# Altium PCB OSD335-X_Devboard.PcbDoc
Units mil, origin at the board's own origin, x right, y up, seen from the top; angles counter-clockwise.
Board outline 3937.01 x 3937.01 mil, 4 copper layers (01_TOP, 02_GND, 03_POWER, 04_BOTTOM), stack 61.811 mil thick; 2 components, 0 nets, 272 pads, 0 vias.
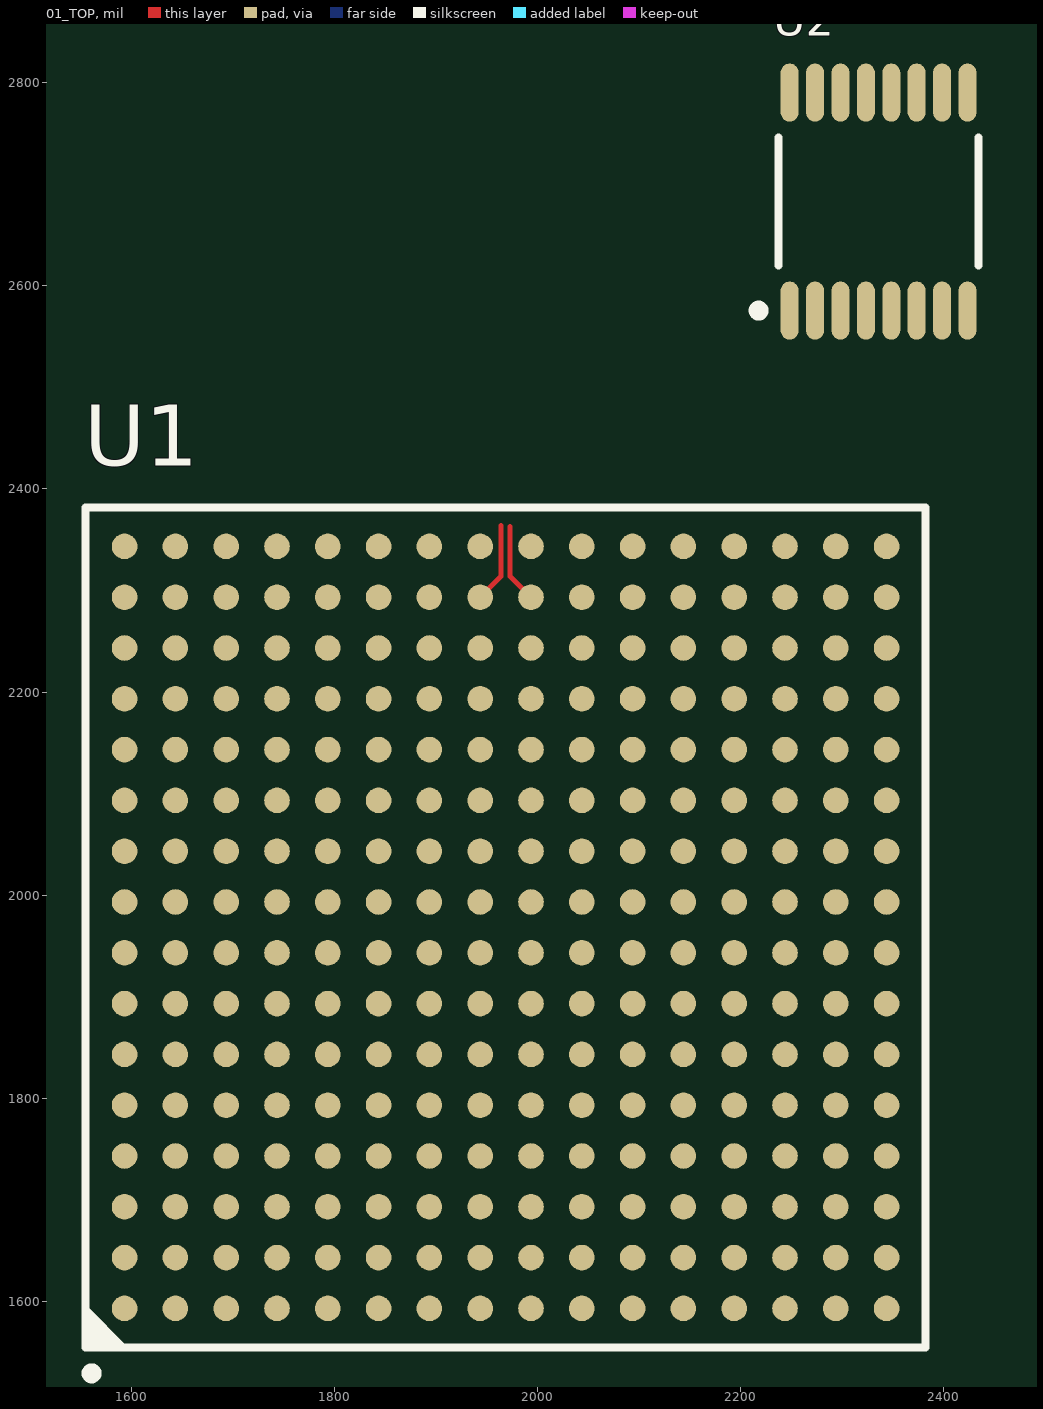
[diagram p0: 01_TOP view]
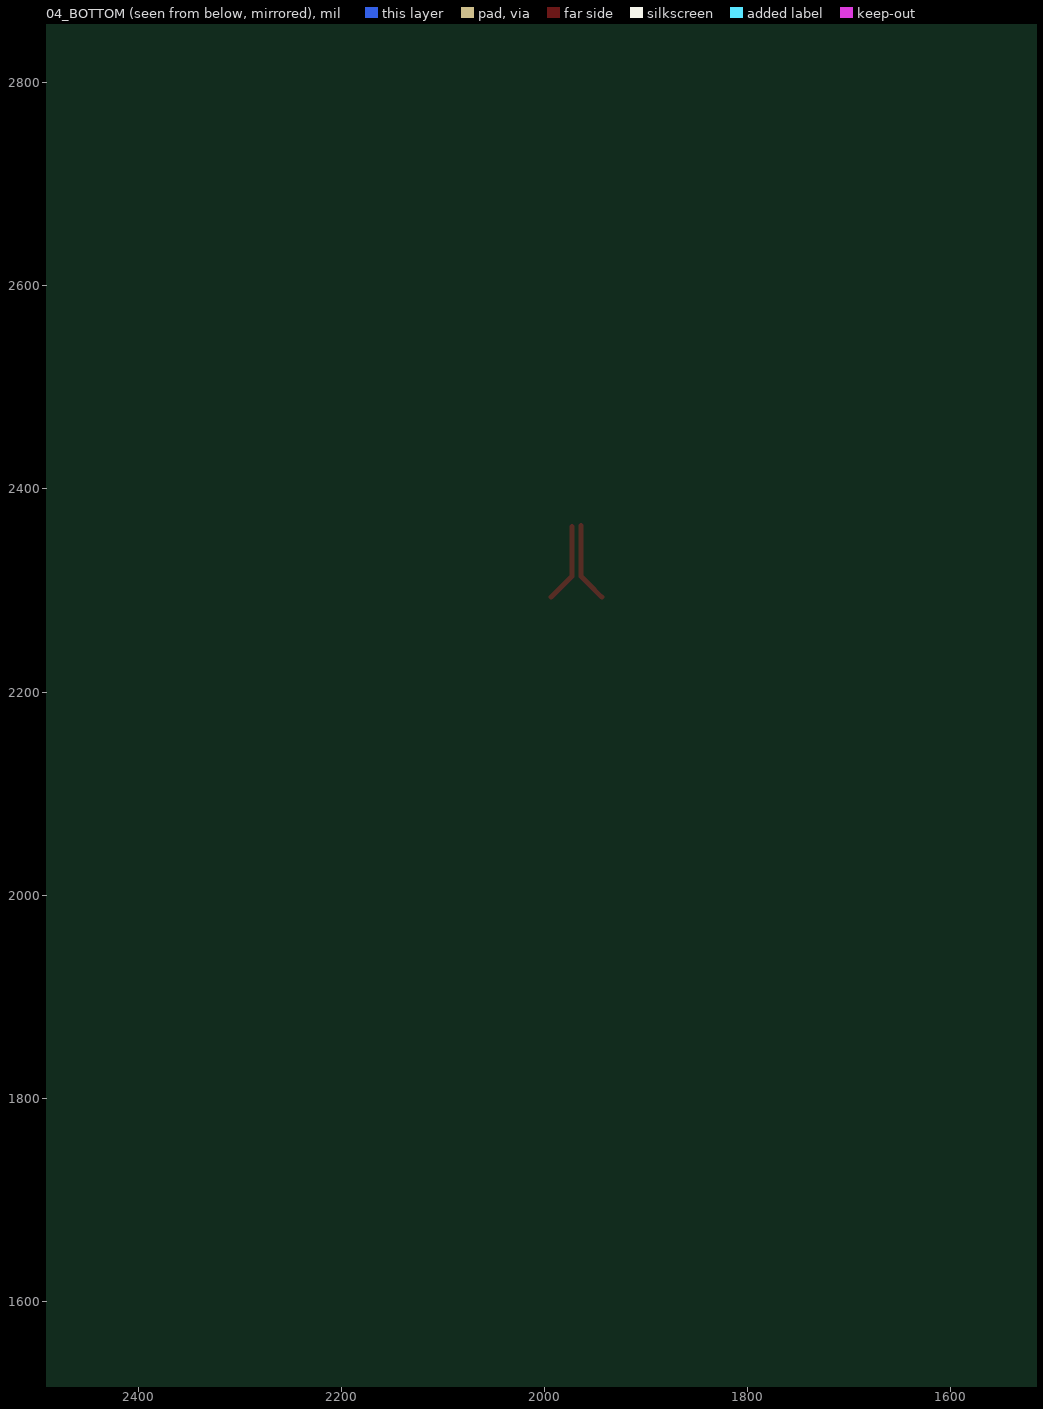
[diagram p1: 04_BOTTOM view, seen from below]

## Layer stack, top to bottom
Top Solder: solder mask 0.4, Solder Resist, Dk 3.5
01_TOP: signal copper 1.3779
Dielectric 4: prepreg 7.874, FR-4, Dk 4.1
02_GND: signal copper 0.6889
Dielectric 1: core 41.9291, Core-009, Dk 4.5
03_POWER: signal copper 0.6889
Dielectric 5: prepreg 7.874, FR-4, Dk 4.1
04_BOTTOM: signal copper 1.3779
Bottom Solder: solder mask 0.4, Solder Resist, Dk 3.5

## Board outline
0,0 3937.01,0 3937.01,3937.01 0,3937.01

## Design rules (kind name [scope] priority, off if disabled: settings)
BoardOutlineClearance [All] p1: gap=10 ignorepadtopadclearanceinfootprint=FALSE except(0: Arc-SplitContinuation Track-SplitContinuation SMDPad-SplitContinuation THPad-SplitContinuation Via-SplitContinuation Fill-SplitContinuation Poly-SplitContinuation Region-SplitContinuation Text-SplitContinuation)
Clearance [All] p1: gap=6 ignorepadtopadclearanceinfootprint=FALSE except(4: Arc-Arc Arc-Track Track-Track; 5: Arc-SMDPad Track-SMDPad)
DiffPairsRouting [All] p1: maxlimit=30 minlimit=5 mostfreqgap=12 toplayer_minwidth=5 toplayer_maxwidth=30 toplayer_prefwidth=12 midlayer1_minwidth=5 midlayer1_maxwidth=30 midlayer1_prefwidth=12 midlayer2_minwidth=5 midlayer2_maxwidth=30 midlayer2_prefwidth=12 bottomlayer_minwidth=5 bottomlayer_maxwidth=30 bottomlayer_prefwidth=12 maxuncoupledlength=500
HoleSize [All] p1: absolutevalues=TRUE maxlimit=120 minlimit=1 maxpercent=80.000 minpercent=20.000
MinimumSolderMaskSliver [All] p1: minsoldermaskwidth=5
PolygonConnect [All] p1: thpad.connectstyle=Relief thpad.reliefconductorwidth=10 thpad.reliefentries=4 thpad.polygonreliefangle="90 Angle" thpad.airgapwidth=10 smdpad.connectstyle=Relief smdpad.reliefconductorwidth=10 smdpad.reliefentries=4 smdpad.polygonreliefangle="90 Angle" smdpad.airgapwidth=10 via.connectstyle=Direct via.reliefconductorwidth=10 via.reliefentries=4 via.polygonreliefangle="90 Angle" via.airgapwidth=10
RoutingVias [All] p1: holewidth=12 width=22 viastyle="Through Hole" minholewidth=10 minwidth=20 maxholewidth=50 maxwidth=70
SilkToSilkClearance [All] p1: silktosilkclearance=2
SilkToSolderMaskClearance [IsPad] p1: minsilkscreentomaskgap=2 clearancetoexposedcopper=TRUE
SolderMaskExpansion [All] p1: expansion=4
Width [All] p1: maxlimit=100 minlimit=5 preferedwidth=10 toplayer_maxwidth=10 toplayer_prefwidth=5 bottomlayer_prefwidth=5 minimp=50.000000 maximp=50.000000 favimp=50.000000
25 further rules are at their usual default settings.

## Components (designator, comment, footprint, x,y, rotation, side; value= is the part's Value field where it differs from the comment)
U1 "Comment" BGA256C127P16X16_2100X2100X308 1968.5,1968.5 r90 top locked
U2 "Comment" SOP64P600X175-16N 2335.62,2682.88 r90 top

## Footprints (in the part's own frame and the unit in brackets; to place one, negate y for a bottom-side part, rotate by r counter-clockwise, add the part's x,y. Pads: shape width x height; smd on the part's side, far side on the other; paste and mask are expansions set on the pad)
BGA256C127P16X16_2100X2100X308 [mm] "BGA, 256-Leads, Body 21.00x21.00mmx3.08mm, Pitch 1.27mm"
  round 0.64 smd: A1(-9.525,9.525) A2(-8.255,9.525) A3(-6.985,9.525) A4(-5.715,9.525) A5(-4.445,9.525) A6(-3.175,9.525) A7(-1.905,9.525) A8(-0.635,9.525) A9(0.635,9.525) A10(1.905,9.525) A11(3.175,9.525) A12(4.445,9.525) A13(5.715,9.525) A14(6.985,9.525) A15(8.255,9.525) A16(9.525,9.525) B1(-9.525,8.255) B2(-8.255,8.255) B3(-6.985,8.255) B4(-5.715,8.255) B5(-4.445,8.255) B6(-3.175,8.255) B7(-1.905,8.255) B8(-0.635,8.255) B9(0.635,8.255) B10(1.905,8.255) B11(3.175,8.255) B12(4.445,8.255) B13(5.715,8.255) B14(6.985,8.255) B15(8.255,8.255) B16(9.525,8.255) C1(-9.525,6.985) C2(-8.255,6.985) C3(-6.985,6.985) C4(-5.715,6.985) C5(-4.445,6.985) C6(-3.175,6.985) C7(-1.905,6.985) C8(-0.635,6.985) C9(0.635,6.985) C10(1.905,6.985) C11(3.175,6.985) C12(4.445,6.985) C13(5.715,6.985) C14(6.985,6.985) C15(8.255,6.985) C16(9.525,6.985) D1(-9.525,5.715) D2(-8.255,5.715) D3(-6.985,5.715) D4(-5.715,5.715) D5(-4.445,5.715) D6(-3.175,5.715) D7(-1.905,5.715) D8(-0.635,5.715) D9(0.635,5.715) D10(1.905,5.715) D11(3.175,5.715) D12(4.445,5.715) D13(5.715,5.715) D14(6.985,5.715) D15(8.255,5.715) D16(9.525,5.715) E1(-9.525,4.445) E2(-8.255,4.445) E3(-6.985,4.445) E4(-5.715,4.445) E5(-4.445,4.445) E6(-3.175,4.445) E7(-1.905,4.445) E8(-0.635,4.445) E9(0.635,4.445) E10(1.905,4.445) E11(3.175,4.445) E12(4.445,4.445) E13(5.715,4.445) E14(6.985,4.445) E15(8.255,4.445) E16(9.525,4.445) F1(-9.525,3.175) F2(-8.255,3.175) F3(-6.985,3.175) F4(-5.715,3.175) F5(-4.445,3.175) F6(-3.175,3.175) F7(-1.905,3.175) F8(-0.635,3.175) F9(0.635,3.175) F10(1.905,3.175) F11(3.175,3.175) F12(4.445,3.175) F13(5.715,3.175) F14(6.985,3.175) F15(8.255,3.175) F16(9.525,3.175) G1(-9.525,1.905) G2(-8.255,1.905) G3(-6.985,1.905) G4(-5.715,1.905) G5(-4.445,1.905) G6(-3.175,1.905) G7(-1.905,1.905) G8(-0.635,1.905) G9(0.635,1.905) G10(1.905,1.905) G11(3.175,1.905) G12(4.445,1.905) G13(5.715,1.905) G14(6.985,1.905) G15(8.255,1.905) G16(9.525,1.905) H1(-9.525,0.635) H2(-8.255,0.635) H3(-6.985,0.635) H4(-5.715,0.635) H5(-4.445,0.635) H6(-3.175,0.635) H7(-1.905,0.635) H8(-0.635,0.635) H9(0.635,0.635) H10(1.905,0.635) H11(3.175,0.635) H12(4.445,0.635) H13(5.715,0.635) H14(6.985,0.635) H15(8.255,0.635) H16(9.525,0.635) J1(-9.525,-0.635) J2(-8.255,-0.635) J3(-6.985,-0.635) J4(-5.715,-0.635) J5(-4.445,-0.635) J6(-3.175,-0.635) J7(-1.905,-0.635) J8(-0.635,-0.635) J9(0.635,-0.635) J10(1.905,-0.635) J11(3.175,-0.635) J12(4.445,-0.635) J13(5.715,-0.635) J14(6.985,-0.635) J15(8.255,-0.635) J16(9.525,-0.635) K1(-9.525,-1.905) K2(-8.255,-1.905) K3(-6.985,-1.905) K4(-5.715,-1.905) K5(-4.445,-1.905) K6(-3.175,-1.905) K7(-1.905,-1.905) K8(-0.635,-1.905) K9(0.635,-1.905) K10(1.905,-1.905) K11(3.175,-1.905) K12(4.445,-1.905) K13(5.715,-1.905) K14(6.985,-1.905) K15(8.255,-1.905) K16(9.525,-1.905) L1(-9.525,-3.175) L2(-8.255,-3.175) L3(-6.985,-3.175) L4(-5.715,-3.175) L5(-4.445,-3.175) L6(-3.175,-3.175) L7(-1.905,-3.175) L8(-0.635,-3.175) L9(0.635,-3.175) L10(1.905,-3.175) L11(3.175,-3.175) L12(4.445,-3.175) L13(5.715,-3.175) L14(6.985,-3.175) L15(8.255,-3.175) L16(9.525,-3.175) M1(-9.525,-4.445) M2(-8.255,-4.445) M3(-6.985,-4.445) M4(-5.715,-4.445) M5(-4.445,-4.445) M6(-3.175,-4.445) M7(-1.905,-4.445) M8(-0.635,-4.445) M9(0.635,-4.445) M10(1.905,-4.445) M11(3.175,-4.445) M12(4.445,-4.445) M13(5.715,-4.445) M14(6.985,-4.445) M15(8.255,-4.445) M16(9.525,-4.445) N1(-9.525,-5.715) N2(-8.255,-5.715) N3(-6.985,-5.715) N4(-5.715,-5.715) N5(-4.445,-5.715) N6(-3.175,-5.715) N7(-1.905,-5.715) N8(-0.635,-5.715) N9(0.635,-5.715) N10(1.905,-5.715) N11(3.175,-5.715) N12(4.445,-5.715) N13(5.715,-5.715) N14(6.985,-5.715) N15(8.255,-5.715) N16(9.525,-5.715) P1(-9.525,-6.985) P2(-8.255,-6.985) P3(-6.985,-6.985) P4(-5.715,-6.985) P5(-4.445,-6.985) P6(-3.175,-6.985) P7(-1.905,-6.985) P8(-0.635,-6.985) P9(0.635,-6.985) P10(1.905,-6.985) P11(3.175,-6.985) P12(4.445,-6.985) P13(5.715,-6.985) P14(6.985,-6.985) P15(8.255,-6.985) P16(9.525,-6.985) R1(-9.525,-8.255) R2(-8.255,-8.255) R3(-6.985,-8.255) R4(-5.715,-8.255) R5(-4.445,-8.255) R6(-3.175,-8.255) R7(-1.905,-8.255) R8(-0.635,-8.255) R9(0.635,-8.255) R10(1.905,-8.255) R11(3.175,-8.255) R12(4.445,-8.255) R13(5.715,-8.255) R14(6.985,-8.255) R15(8.255,-8.255) R16(9.525,-8.255) T1(-9.525,-9.525) T2(-8.255,-9.525) T3(-6.985,-9.525) T4(-5.715,-9.525) T5(-4.445,-9.525) T6(-3.175,-9.525) T7(-1.905,-9.525) T8(-0.635,-9.525) T9(0.635,-9.525) T10(1.905,-9.525) T11(3.175,-9.525) T12(4.445,-9.525) T13(5.715,-9.525) T14(6.985,-9.525) T15(8.255,-9.525) T16(9.525,-9.525)
  silkscreen extent -11.27,-10.5 10.5,10.5, body extent -10.5,-10.5 10.5,10.5, height 3.08
SOP64P600X175-16N [mm] "SOP, 16-Leads, Body 4.90x3.90mm, Pitch 0.64mm, IPC Medium Density"
  oval 1.45x0.45 smd: 1(-2.725,2.222) 2(-2.725,1.587) 3(-2.725,0.952) 4(-2.725,0.317) 5(-2.725,-0.318) 6(-2.725,-0.953) 7(-2.725,-1.588) 8(-2.725,-2.222) 9(2.725,-2.222) 10(2.725,-1.587) 11(2.725,-0.952) 12(2.725,-0.317) 13(2.725,0.318) 14(2.725,0.953) 15(2.725,1.588) 16(2.725,2.222)
  silkscreen extent -2.85,-2.5 1.6,3.12, body extent -3,-2.5 3,2.5, height 1.75

## Nets (pads, with @x,y where several pads share a name; then routed paths per layer and width w, separated by ;. In a path a pad name is that pad's centre, name@x,y a point inside that pad or via, vN(x,y) a via of type N, cw(c..) or ccw(c..) an arc to the next point about the centre after c; other vN are vias at no path point)
pads on no net: U1.A1 U1.A2 U1.A3 U1.A4 U1.A5 U1.A6 U1.A7 U1.A8 U1.A9 U1.A10 U1.A11 U1.A12 U1.A13 U1.A14 U1.A15 U1.A16 U1.B1 U1.B2 U1.B3 U1.B4 U1.B5 U1.B6 U1.B7 U1.B8 U1.B9 U1.B10 U1.B11 U1.B12 U1.B13 U1.B14 U1.B15 U1.B16 U1.C1 U1.C2 U1.C3 U1.C4 U1.C5 U1.C6 U1.C7 U1.C8 U1.C9 U1.C10 U1.C11 U1.C12 U1.C13 U1.C14 U1.C15 U1.C16 U1.D1 U1.D2 U1.D3 U1.D4 U1.D5 U1.D6 U1.D7 U1.D8 U1.D9 U1.D10 U1.D11 U1.D12 U1.D13 U1.D14 U1.D15 U1.D16 U1.E1 U1.E2 U1.E3 U1.E4 U1.E5 U1.E6 U1.E7 U1.E8 U1.E9 U1.E10 U1.E11 U1.E12 U1.E13 U1.E14 U1.E15 U1.E16 U1.F1 U1.F2 U1.F3 U1.F4 U1.F5 U1.F6 U1.F7 U1.F8 U1.F9 U1.F10 U1.F11 U1.F12 U1.F13 U1.F14 U1.F15 U1.F16 U1.G1 U1.G2 U1.G3 U1.G4 U1.G5 U1.G6 U1.G7 U1.G8 U1.G9 U1.G10 U1.G11 U1.G12 U1.G13 U1.G14 U1.G15 U1.G16 U1.H1 U1.H2 U1.H3 U1.H4 U1.H5 U1.H6 U1.H7 U1.H8 U1.H9 U1.H10 U1.H11 U1.H12 U1.H13 U1.H14 U1.H15 U1.H16 U1.J1 U1.J2 U1.J3 U1.J4 U1.J5 U1.J6 U1.J7 U1.J8 U1.J9 U1.J10 U1.J11 U1.J12 U1.J13 U1.J14 U1.J15 U1.J16 U1.K1 U1.K2 U1.K3 U1.K4 U1.K5 U1.K6 U1.K7 U1.K8 U1.K9 U1.K10 U1.K11 U1.K12 U1.K13 U1.K14 U1.K15 U1.K16 U1.L1 U1.L2 U1.L3 U1.L4 U1.L5 U1.L6 U1.L7 U1.L8 U1.L9 U1.L10 U1.L11 U1.L12 U1.L13 U1.L14 U1.L15 U1.L16 U1.M1 U1.M2 U1.M3 U1.M4 U1.M5 U1.M6 U1.M7 U1.M8 U1.M9 U1.M10 U1.M11 U1.M12 U1.M13 U1.M14 U1.M15 U1.M16 U1.N1 U1.N2 U1.N3 U1.N4 U1.N5 U1.N6 U1.N7 U1.N8 U1.N9 U1.N10 U1.N11 U1.N12 U1.N13 U1.N14 U1.N15 U1.N16 U1.P1 U1.P2 U1.P3 U1.P4 U1.P5 U1.P6 U1.P7 U1.P8 U1.P9 U1.P10 U1.P11 U1.P12 U1.P13 U1.P14 U1.P15 U1.P16 U1.R1 U1.R2 U1.R3 U1.R4 U1.R5 U1.R6 U1.R7 U1.R8 U1.R9 U1.R10 U1.R11 U1.R12 U1.R13 U1.R14 U1.R15 U1.R16 U1.T1 U1.T2 U1.T3 U1.T4 U1.T5 U1.T6 U1.T7 U1.T8 U1.T9 U1.T10 U1.T11 U1.T12 U1.T13 U1.T14 U1.T15 U1.T16 U2.1 U2.2 U2.3 U2.4 U2.5 U2.6 U2.7 U2.8 U2.9 U2.10 U2.11 U2.12 U2.13 U2.14 U2.15 U2.16
copper on no net: | length 156.8
  01_TOP w5: 1943.5,2293.5 1957.72,2307.72 1963.88,2313.88 1963.88,2363.88 ; 1972.88,2363 1972.88,2325.25 1972.88,2314.13 1993.5,2293.5

## Silkscreen, mask and mechanical layers (free items; w line width, h text height)
Mechanical 4 (Mech4):
  the board outline again, w39.37